# Altium PCB AT89S52多功能板.PcbDoc (part 4 of 5)
Units mm, origin at the board's own origin, x right, y up, seen from the top; angles counter-clockwise.
Board outline 152.4 x 101.6 mm, 2 copper layers (Top Layer, Bottom Layer); 140 components, 143 nets, 570 pads, 50 vias.
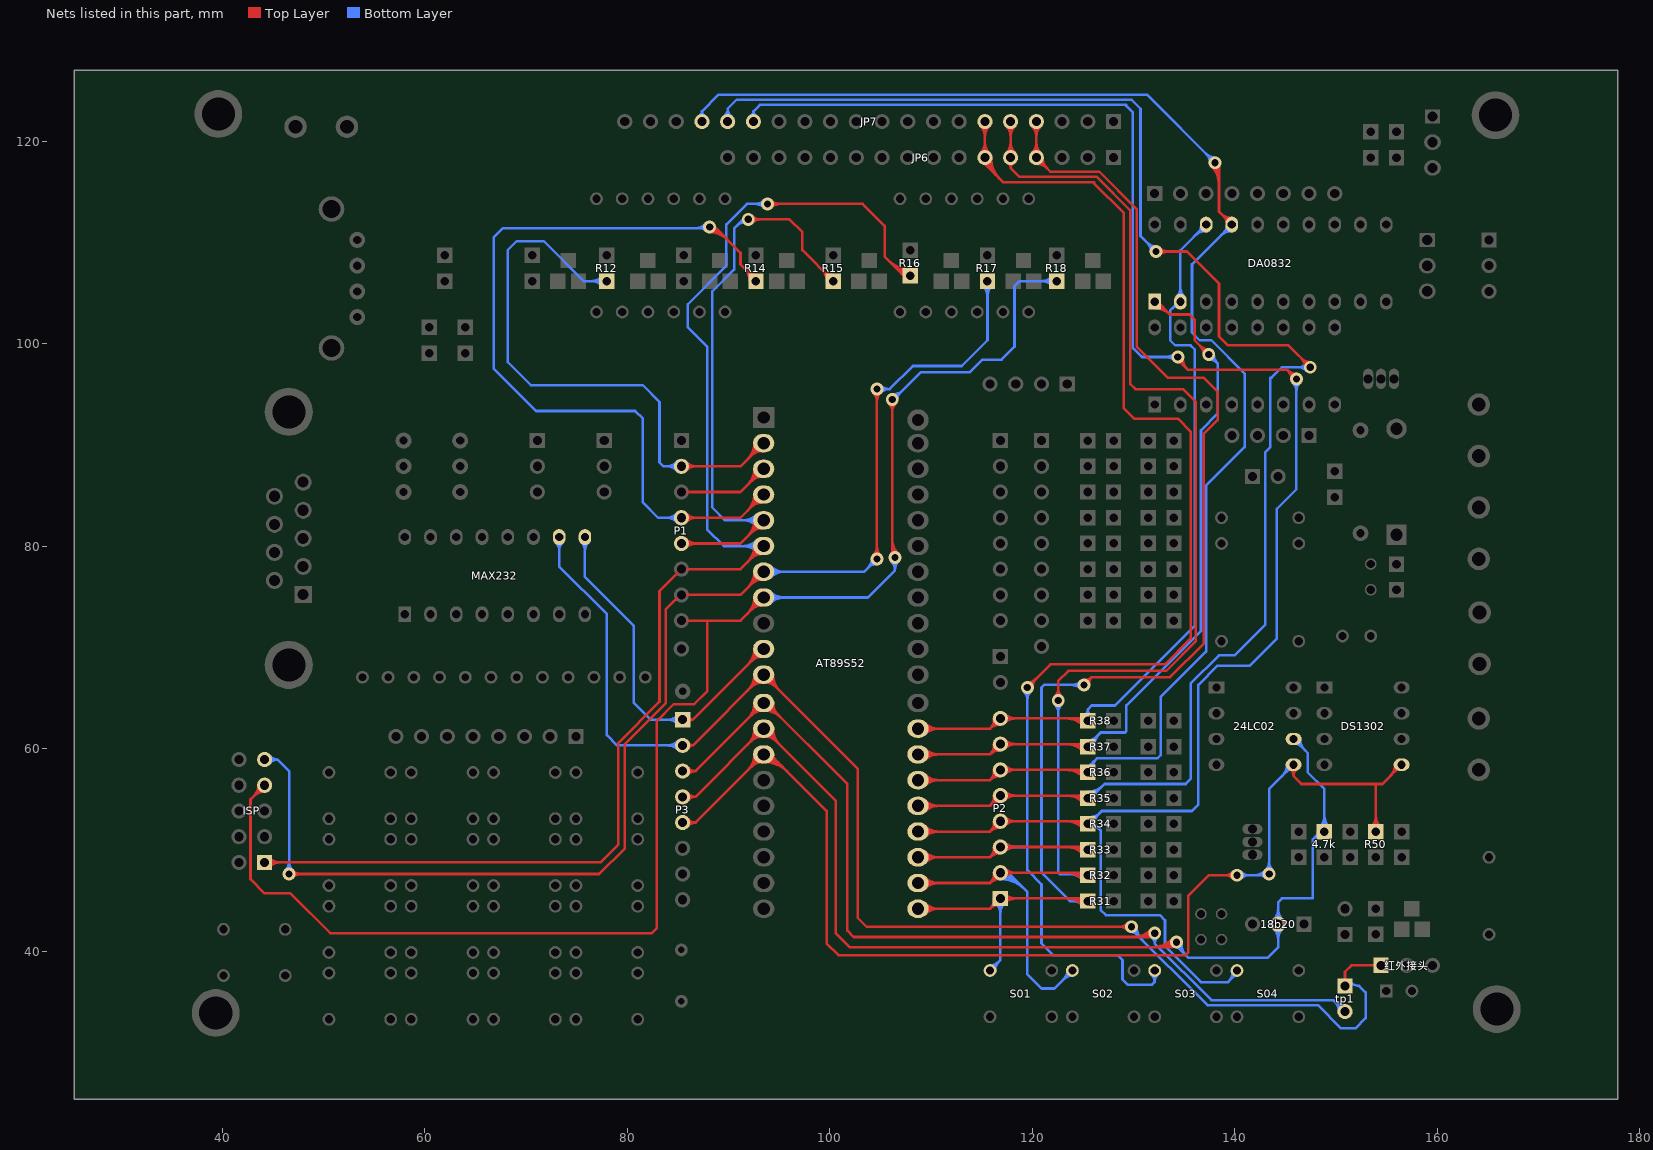
[diagram p4: the nets of this part, all layers, seen from the top]

## Via types
v1: diameter 1.27, hole 0.711, Top Layer to Bottom Layer, 50 vias

## Nets (pads, with @x,y where several pads share a name; then routed paths per layer and width w, separated by ;. In a path a pad name is that pad's centre, name@x,y a point inside that pad or via, vN(x,y) a via of type N, cw(c..) or ccw(c..) an arc to the next point about the centre after c; other vN are vias at no path point) (continued)
P11: AT89S52.2 P1.2 R12.1 | length 73.9
  Top Layer w0.254: P1.2@85.344,87.884 91.183,87.884 AT89S52.2@93.468,90.169 ; P1.2@85.605,87.623 cw(c86.235,86.993) 86.235,87.884 cw(c86.235,88.775) P1.2@85.605,88.145 ; P1.2@85.785,87.443 cw(c86.848,86.38) 86.848,87.884 cw(c86.848,89.388) P1.2@85.785,88.325 ; 91.888,88.589 ccw(c90.309,90.169) AT89S52.2@92.543,90.169 ; 92.251,88.951 cw(c93.318,87.884) AT89S52.2@93.318,89.394 ; 92.322,89.023 ccw(c91.176,90.169) AT89S52.2@92.797,90.169 ; 92.684,89.385 cw(c93.318,88.751) AT89S52.2@93.318,89.648 ; 92.756,89.456 ccw(c92.043,90.169) AT89S52.2@93.051,90.169
  Bottom Layer w0.254: R12.1@77.529,105.723 ccw(c76.445,104.639) 76.445,106.172 ccw(c76.445,107.705) R12.1@77.529,106.621 ; R12.1@77.709,105.903 ccw(c77.058,105.252) 77.058,106.172 ccw(c77.058,107.092) R12.1@77.709,106.441 ; R12.1@77.978,106.172 75.692,106.172 71.755,110.109 69.088,110.109 68.199,109.22 68.199,98.171 70.485,95.885 81.534,95.885 83.185,94.234 83.185,88.265 83.566,87.884 P1.2@85.344,87.884 ; P1.2@84.903,87.443 ccw(c83.84,86.38) 83.84,87.884 ccw(c83.84,89.388) P1.2@84.903,88.325 ; P1.2@85.083,87.623 ccw(c84.453,86.993) 84.453,87.884 ccw(c84.453,88.775) P1.2@85.083,88.145
P12: P1.3 R13.1 | length 65.1
  Bottom Layer w0.254: P1.3@84.903,84.903 ccw(c83.84,83.84) 83.84,85.344 ccw(c83.84,86.848) P1.3@84.903,85.785 ; P1.3@85.083,85.083 ccw(c84.453,84.453) 84.453,85.344 ccw(c84.453,86.235) P1.3@85.083,85.605 ; R13.1@85.09,105.791 ccw(c84.328,105.22) 84.328,106.172 ; R13.1@85.09,106.553 cw(c84.328,107.124) 84.328,106.172 ; P1.3@85.344,85.344 83.312,85.344 82.296,86.36 82.296,93.599 81.153,94.742 70.739,94.742 67.564,97.917 67.564,109.982 68.326,110.744 79.756,110.744 84.328,106.172 ; R13.1@85.598,106.172 84.328,106.172
P12: AT89S52.3 | length 14.8
  Top Layer w0.254: 85.344,85.344 91.183,85.344 AT89S52.3@93.468,87.629 ; 91.888,86.049 ccw(c90.309,87.629) AT89S52.3@92.543,87.629 ; 92.251,86.411 cw(c93.318,85.344) AT89S52.3@93.318,86.854 ; 92.322,86.483 ccw(c91.176,87.629) AT89S52.3@92.797,87.629 ; 92.684,86.845 cw(c93.318,86.211) AT89S52.3@93.318,87.108 ; 92.756,86.916 ccw(c92.043,87.629) AT89S52.3@93.051,87.629
P13: 
P13: AT89S52.4 P1.4 R14.1 | length 104.3
  Top Layer w0.254: P1.4@85.344,82.804 91.183,82.804 AT89S52.4@93.468,85.089 ; P1.4@85.605,82.543 cw(c86.235,81.913) 86.235,82.804 cw(c86.235,83.695) P1.4@85.605,83.065 ; P1.4@85.785,82.363 cw(c86.848,81.3) 86.848,82.804 cw(c86.848,84.308) P1.4@85.785,83.245 ; v1@88.138,110.998 cw(c88.138,108.545) 89.872,110.28 ; v1@88.138,111.252 cw(c88.138,109.412) 89.439,110.713 ; 89.005,111.147 ccw(c88.138,110.28) v1(88.138,111.506) 88.646,111.506 91.186,108.966 91.186,107.823 92.71,106.299 R14.1@92.71,106.172 ; 91.536,107.473 cw(c90.235,106.172) R14.1@92.075,106.172 ; 91.843,107.166 ccw(c92.71,108.033) R14.1@92.71,106.807 ; 91.888,83.509 ccw(c90.309,85.089) AT89S52.4@92.543,85.089 ; 91.97,107.039 cw(c91.103,106.172) R14.1@92.329,106.172 ; 92.251,83.871 cw(c93.318,82.804) AT89S52.4@93.318,84.314 ; 92.322,83.943 ccw(c91.176,85.089) AT89S52.4@92.797,85.089 ; 92.684,84.305 cw(c93.318,83.671) AT89S52.4@93.318,84.568 ; 92.756,84.376 ccw(c92.043,85.089) AT89S52.4@93.051,85.089
  Bottom Layer w0.254: P1.4@84.903,82.363 ccw(c83.84,81.3) 83.84,82.804 ccw(c83.84,84.308) P1.4@84.903,83.245 ; P1.4@85.083,82.543 ccw(c84.453,81.913) 84.453,82.804 ccw(c84.453,83.695) P1.4@85.083,83.065 ; P1.4@85.344,82.804 83.058,82.804 81.534,84.328 81.534,92.583 80.772,93.345 70.993,93.345 66.802,97.536 66.802,110.49 67.691,111.379 v1@88.011,111.379 ; 86.605,111.379 ccw(c86.605,113.039) v1@87.779,111.865 ; v1@87.779,111.147 ccw(c87.218,110.586) 87.218,111.379 ccw(c87.218,112.426) v1@87.958,111.686
P14: 
P14: AT89S52.5 P1.5 R15.1 | length 79.3
  Top Layer w0.254: P1.5@85.344,80.264 91.183,80.264 AT89S52.5@93.468,82.549 ; P1.5@85.605,80.003 cw(c86.235,79.373) 86.235,80.264 cw(c86.235,81.155) P1.5@85.605,80.525 ; P1.5@85.785,79.823 cw(c86.848,78.76) 86.848,80.264 cw(c86.848,81.768) P1.5@85.785,80.705 ; 91.888,80.969 ccw(c90.309,82.549) AT89S52.5@92.543,82.549 ; v1(91.948,112.268) 96.012,112.268 97.282,110.998 97.282,109.22 R15.1@100.33,106.172 ; 92.251,81.331 cw(c93.318,80.264) AT89S52.5@93.318,81.774 ; v1@92.307,111.909 cw(c93.174,111.042) 93.174,112.268 cw(c93.174,113.494) v1@92.307,112.627 ; 92.322,81.403 ccw(c91.176,82.549) AT89S52.5@92.797,82.549 ; 92.684,81.765 cw(c93.318,81.131) AT89S52.5@93.318,82.028 ; 92.756,81.836 ccw(c92.043,82.549) AT89S52.5@93.051,82.549 ; R15.1@99.695,106.172 ccw(c98.162,106.172) 99.246,107.256 ccw(c100.33,108.34) R15.1@100.33,106.807 ; R15.1@99.949,106.172 ccw(c99.029,106.172) 99.68,106.822 ccw(c100.33,107.473) R15.1@100.33,106.553
  Bottom Layer w0.254: 90.706,111.534 cw(c91.869,110.372) v1@91.937,112.014 ; 91.115,111.943 cw(c91.901,111.157) v1(91.948,112.268) 91.44,112.268 90.551,111.379 90.551,107.315 88.392,105.156 88.392,83.82 89.663,82.549 AT89S52.5@93.468,82.549 ; AT89S52.5@92.77,82.001 ccw(c91.446,80.677) 91.446,82.549 ccw(c91.446,84.421) AT89S52.5@92.77,83.097 ; AT89S52.5@92.95,82.18 ccw(c92.059,81.29) 92.059,82.549 ccw(c92.059,83.808) AT89S52.5@92.95,82.918
P15: AT89S52.6 ISP.1 R16.1 | length 161.9
  Top Layer w0.254: ISP.1@44.196,48.768 77.343,48.768 79.121,50.546 79.121,60.579 83.185,64.643 83.185,75.565 85.344,77.724 91.183,77.724 AT89S52.6@93.468,80.009 ; ISP.1@44.457,48.507 cw(c45.087,47.877) 45.087,48.768 cw(c45.087,49.659) ISP.1@44.457,49.029 ; ISP.1@44.637,48.327 cw(c45.7,47.264) 45.7,48.768 cw(c45.7,50.272) ISP.1@44.637,49.209 ; 91.888,78.429 ccw(c90.309,80.009) AT89S52.6@92.543,80.009 ; 92.251,78.791 cw(c93.318,77.724) AT89S52.6@93.318,79.234 ; 92.322,78.863 ccw(c91.176,80.009) AT89S52.6@92.797,80.009 ; 92.684,79.225 cw(c93.318,78.591) AT89S52.6@93.318,79.488 ; 92.756,79.296 ccw(c92.043,80.009) AT89S52.6@93.051,80.009 ; v1(93.853,113.792) 103.251,113.792 105.41,111.633 105.41,108.585 107.315,106.68 R16.1@107.95,106.68 ; v1@94.212,113.433 cw(c95.079,112.566) 95.079,113.792 cw(c95.079,115.018) v1@94.212,114.151 ; 105.782,108.213 ccw(c107.95,110.381) R16.1@107.95,107.315 ; 106.216,107.779 ccw(c107.95,109.514) R16.1@107.95,107.061 ; 106.649,107.346 ccw(c107.95,108.647) R16.1@107.95,106.807 ; 107.083,106.912 ccw(c107.95,107.779) R16.1@107.95,106.553
  Bottom Layer w0.254: AT89S52.6@92.77,79.461 ccw(c91.446,78.137) 91.446,80.009 ccw(c91.446,81.881) AT89S52.6@92.77,80.557 ; AT89S52.6@92.95,79.64 ccw(c92.059,78.75) 92.059,80.009 ccw(c92.059,81.268) AT89S52.6@92.95,80.378 ; AT89S52.6@93.468,80.009 89.536,80.009 87.884,81.661 87.884,99.695 85.979,101.6 85.979,103.886 89.789,107.696 89.789,111.76 91.821,113.792 v1(93.853,113.792) ; v1@93.494,113.433 ccw(c92.627,112.566) 92.627,113.792 ccw(c92.627,115.018) v1@93.494,114.151
P16: AT89S52.7 ISP.9 R17.1 | length 159.9
  Top Layer w0.254: v1(46.609,47.625) 77.216,47.625 79.756,50.165 79.756,60.452 83.82,64.516 83.82,73.787 85.217,75.184 91.183,75.184 AT89S52.7@93.468,77.469 ; v1@46.968,47.266 cw(c47.835,46.399) 47.835,47.625 cw(c47.835,48.851) v1@46.968,47.984 ; 91.888,75.889 ccw(c90.309,77.469) AT89S52.7@92.543,77.469 ; 92.251,76.251 cw(c93.318,75.184) AT89S52.7@93.318,76.694 ; 92.322,76.323 ccw(c91.176,77.469) AT89S52.7@92.797,77.469 ; 92.684,76.685 cw(c93.318,76.051) AT89S52.7@93.318,76.948 ; 92.756,76.756 ccw(c92.043,77.469) AT89S52.7@93.051,77.469 ; v1@104.289,79.099 ccw(c103.422,79.966) 104.648,79.966 ccw(c105.874,79.966) v1@105.007,79.099 ; v1@104.289,95.145 cw(c103.422,94.278) 104.648,94.278 cw(c105.874,94.278) v1@105.007,95.145 ; v1(104.648,78.74) v1(104.648,95.504)
  Bottom Layer w0.254: ISP.9@44.196,58.928 45.466,58.928 ; ISP.9@44.488,58.702 cw(c44.948,58.346) 44.948,58.928 cw(c44.948,59.51) ISP.9@44.488,59.154 ; ISP.9@44.689,58.547 cw(c45.466,57.945) 45.466,58.928 ; ISP.9@44.689,59.309 ccw(c45.466,59.911) 45.466,58.928 ; v1@46.25,47.984 ccw(c45.383,48.851) 46.609,48.851 ccw(c47.835,48.851) v1@46.968,47.984 ; v1(46.609,47.625) 46.609,57.785 45.466,58.928 ; AT89S52.7@93.468,77.469 103.377,77.469 v1(104.648,78.74) ; AT89S52.7@93.987,77.1 cw(c94.877,76.21) 94.877,77.469 cw(c94.877,78.728) AT89S52.7@93.987,77.838 ; AT89S52.7@94.166,76.921 cw(c95.49,75.597) 95.49,77.469 cw(c95.49,79.341) AT89S52.7@94.166,78.017 ; v1@104.14,78.74 cw(c102.914,78.74) 103.781,77.873 cw(c104.648,77.006) v1@104.648,78.232 ; v1(104.648,95.504) 105.918,95.504 108.204,97.79 113.03,97.79 115.57,100.33 R17.1@115.57,106.172 ; v1@105.007,95.145 cw(c105.874,94.278) 105.874,95.504 cw(c105.874,96.73) v1@105.007,95.863 ; R17.1@115.121,105.723 cw(c114.037,104.639) 115.57,104.639 cw(c117.103,104.639) R17.1@116.019,105.723 ; R17.1@115.301,105.903 cw(c114.65,105.252) 115.57,105.252 cw(c116.49,105.252) R17.1@115.839,105.903
P17: AT89S52.8 ISP.7 R18.1 | length 178.9
  Top Layer w0.254: ISP.7@43.573,56.388 cw(c42.069,56.388) 43.132,55.324 cw(c44.196,54.261) ISP.7@44.196,55.765 ; ISP.7@43.827,56.388 cw(c42.936,56.388) 43.566,55.758 cw(c44.196,55.128) ISP.7@44.196,56.019 ; ISP.7@44.196,56.388 42.799,54.991 42.799,47.117 44.196,45.72 46.736,45.72 50.673,41.783 82.423,41.783 82.931,42.291 82.931,62.738 84.582,64.389 86.614,64.389 87.884,65.659 87.884,72.644 ; 85.344,72.644 91.183,72.644 AT89S52.8@93.468,74.929 ; 91.888,73.349 ccw(c90.309,74.929) AT89S52.8@92.543,74.929 ; 92.251,73.711 cw(c93.318,72.644) AT89S52.8@93.318,74.154 ; 92.322,73.783 ccw(c91.176,74.929) AT89S52.8@92.797,74.929 ; 92.684,74.145 cw(c93.318,73.511) AT89S52.8@93.318,74.408 ; 92.756,74.216 ccw(c92.043,74.929) AT89S52.8@93.051,74.929 ; v1@105.813,94.129 cw(c104.946,93.262) 106.172,93.262 cw(c107.398,93.262) v1@106.531,94.129 ; v1@106.067,79.226 ccw(c105.813,79.48) 106.172,79.48 ccw(c107.039,79.48) v1(106.426,78.867) 106.172,79.121 v1(106.172,94.488) ; 106.172,80.093 ccw(c107.652,80.093) v1@106.606,79.047 ; 106.172,80.707 ccw(c108.266,80.707) v1@106.785,79.226
  Bottom Layer w0.254: AT89S52.8@93.468,74.929 103.758,74.929 106.426,77.597 v1(106.426,78.867) ; AT89S52.8@93.987,74.56 cw(c94.877,73.67) 94.877,74.929 cw(c94.877,76.188) AT89S52.8@93.987,75.298 ; AT89S52.8@94.166,74.381 cw(c95.49,73.057) 95.49,74.929 cw(c95.49,76.801) AT89S52.8@94.166,75.477 ; v1@106.067,78.508 cw(c105.2,77.641) 106.426,77.641 cw(c107.652,77.641) v1@106.785,78.508 ; v1(106.172,94.488) 106.299,94.488 107.188,95.377 cw(c106.263,96.302) v1@106.197,94.995 ; v1@106.185,94.742 ccw(c106.224,95.531) 106.783,94.972 ; v1@106.68,94.488 cw(c107.6,94.488) 106.949,95.138 ; 107.315,95.504 108.966,97.155 113.792,97.155 115.062,98.425 116.967,98.425 118.237,99.695 118.237,105.664 118.745,106.172 R18.1@122.428,106.172 ; R18.1@121.979,105.723 ccw(c120.895,104.639) 120.895,106.172 ccw(c120.895,107.705) R18.1@121.979,106.621 ; R18.1@122.159,105.903 ccw(c121.508,105.252) 121.508,106.172 ccw(c121.508,107.092) R18.1@122.159,106.441
P20: AT89S52.21 JP6.4 JP7.4 P2.1 R31.1 S01.1 | length 172.3
  Top Layer w0.254: AT89S52.21@108.712,44.196 115.824,44.196 ; AT89S52.21@109.231,43.827 cw(c110.121,42.937) 110.121,44.196 cw(c110.121,45.455) AT89S52.21@109.231,44.565 ; AT89S52.21@109.41,43.648 cw(c110.734,42.324) 110.734,44.196 cw(c110.734,46.068) AT89S52.21@109.41,44.744 ; P2.1@116.217,45.192 cw(c114.873,45.147) 115.824,44.196 ; P2.1@116.471,45.2 cw(c115.675,45.174) 116.238,44.61 cw(c116.802,44.047) P2.1@116.828,44.843 ; P2.1@116.82,44.589 ccw(c116.775,43.245) 115.824,44.196 ; P2.1@117.101,44.951 cw(c117.731,44.321) 117.731,45.212 cw(c117.731,46.103) P2.1@117.101,45.473 ; P2.1@117.281,44.771 cw(c118.344,43.708) 118.344,45.212 cw(c118.344,46.716) P2.1@117.281,45.653 ; JP6.4@119.955,118.805 ccw(c118.892,119.868) 120.396,119.868 ccw(c121.9,119.868) JP6.4@120.837,118.805 ; JP7.4@119.955,121.479 cw(c118.892,120.416) 120.396,120.416 cw(c121.9,120.416) JP7.4@120.837,121.479 ; JP6.4@120.135,118.625 ccw(c119.505,119.255) 120.396,119.255 ccw(c121.287,119.255) JP6.4@120.657,118.625 ; JP7.4@120.135,121.659 cw(c119.505,121.029) 120.396,121.029 cw(c121.287,121.029) JP7.4@120.657,121.659 ; JP6.4@120.396,117.741 cw(c120.396,116.237) 121.46,117.3 cw(c122.523,118.364) JP6.4@121.019,118.364 ; JP6.4@120.396,117.995 cw(c120.396,117.104) 121.026,117.734 cw(c121.656,118.364) JP6.4@120.765,118.364 ; JP7.4@120.396,121.92 JP6.4@120.396,118.364 121.793,116.967 126.619,116.967 130.302,113.284 130.302,99.695 133.35,96.647 136.906,96.647 138.303,95.25 138.303,92.456 136.906,91.059 136.906,70.358 133.604,67.056 125.857,67.056 ; 123.33,45.212 cw(c123.33,42.812) R31.1@125.027,44.509 ; 123.943,45.212 cw(c123.943,43.425) R31.1@125.207,44.689 ; R31.1@125.027,45.407 cw(c124.556,45.878) 124.556,45.212 cw(c124.556,44.038) R31.1@125.386,44.868 ; v1(125.095,66.294) 125.857,67.056 ; v1@125.144,66.8 ccw(c125.228,67.685) 125.857,67.056 ; R31.1@125.476,44.958 125.222,45.212 P2.1@116.84,45.212 115.824,44.196 ; v1@125.601,66.343 cw(c126.486,66.427) 125.857,67.056
  Bottom Layer w0.254: S01.1@115.824,38.1 116.84,39.116 P2.1@116.84,45.212 ; S01.1@115.824,38.608 ccw(c115.824,39.834) 116.691,38.967 ccw(c117.558,38.1) S01.1@116.332,38.1 ; P2.1@116.399,44.771 cw(c115.336,43.708) 116.84,43.708 cw(c118.344,43.708) P2.1@117.281,44.771 ; P2.1@116.579,44.951 cw(c115.949,44.321) 116.84,44.321 cw(c117.731,44.321) P2.1@117.101,44.951 ; v1@124.736,65.935 ccw(c123.869,65.068) 123.869,66.294 ccw(c123.869,67.52) v1@124.736,66.653 ; R31.1@125.027,44.509 ccw(c123.943,43.425) 123.943,44.958 ccw(c123.943,46.491) R31.1@125.027,45.407 ; v1(125.095,66.294) 121.158,66.294 120.904,66.04 120.904,47.752 123.698,44.958 R31.1@125.476,44.958 ; R31.1@125.207,44.689 ccw(c124.556,44.038) 124.556,44.958 ccw(c124.556,45.878) R31.1@125.207,45.227
P21: 
P21: AT89S52.22 JP6.5 JP7.5 P2.2 R32.1 S02.1 | length 182.5
  Top Layer w0.254: AT89S52.22@108.712,46.736 115.824,46.736 ; AT89S52.22@109.231,46.367 cw(c110.121,45.477) 110.121,46.736 cw(c110.121,47.995) AT89S52.22@109.231,47.105 ; AT89S52.22@109.41,46.188 cw(c110.734,44.864) 110.734,46.736 cw(c110.734,48.608) AT89S52.22@109.41,47.284 ; P2.2@116.217,47.732 cw(c114.873,47.687) 115.824,46.736 ; P2.2@116.471,47.74 cw(c115.675,47.714) 116.238,47.15 cw(c116.802,46.587) P2.2@116.828,47.383 ; P2.2@116.82,47.129 ccw(c116.775,45.785) 115.824,46.736 ; P2.2@117.101,47.491 cw(c117.731,46.861) 117.731,47.752 cw(c117.731,48.643) P2.2@117.101,48.013 ; P2.2@117.281,47.311 cw(c118.344,46.248) 118.344,47.752 cw(c118.344,49.256) P2.2@117.281,48.193 ; JP6.5@117.415,118.805 ccw(c116.352,119.868) 117.856,119.868 ccw(c119.36,119.868) JP6.5@118.297,118.805 ; JP7.5@117.415,121.479 cw(c116.352,120.416) 117.856,120.416 cw(c119.36,120.416) JP7.5@118.297,121.479 ; JP6.5@117.595,118.625 ccw(c116.965,119.255) 117.856,119.255 ccw(c118.747,119.255) JP6.5@118.117,118.625 ; JP7.5@117.595,121.659 cw(c116.965,121.029) 117.856,121.029 cw(c118.747,121.029) JP7.5@118.117,121.659 ; JP7.5@117.856,121.92 117.856,117.348 ; v1@122.196,65.129 ccw(c121.329,65.996) 122.555,65.996 ccw(c123.781,65.996) v1@122.914,65.129 ; v1(122.555,64.77) 122.555,66.675 123.571,67.691 133.223,67.691 136.144,70.612 136.144,94.234 134.874,95.504 130.175,95.504 129.667,96.012 129.667,113.157 126.365,116.459 118.745,116.459 117.856,117.348 ; 123.33,47.752 cw(c123.33,45.352) R32.1@125.027,47.049 ; 123.943,47.752 cw(c123.943,45.965) R32.1@125.207,47.229 ; R32.1@125.027,47.947 cw(c124.556,48.418) 124.556,47.752 cw(c124.556,46.578) R32.1@125.386,47.408 ; R32.1@125.603,47.498 R32.1@125.476,47.498 125.222,47.752 P2.2@116.84,47.752 115.824,46.736 ; 117.856,117.348 ccw(c117.339,117.348) 117.573,117.809 cw(c117.339,117.348) 117.856,117.348 ; 117.856,117.348 cw(c118.373,117.348) 118.139,117.809 ccw(c118.373,117.348) 117.856,117.348
  Bottom Layer w0.254: P2.2@116.84,47.129 cw(c116.84,43.785) 119.204,46.15 ; P2.2@116.84,47.383 cw(c116.84,44.653) 118.771,46.583 ; P2.2@116.84,47.637 cw(c116.84,45.52) 118.337,47.017 ; P2.2@116.84,47.752 117.602,47.752 ; P2.2@116.84,47.891 cw(c116.84,46.387) 117.904,47.45 ; v1@122.196,64.411 cw(c121.329,63.544) 122.555,63.544 cw(c123.781,63.544) v1@122.914,64.411 ; v1(122.555,64.77) 122.555,47.752 122.682,47.625 125.349,47.625 R32.1@125.476,47.498 ; S02.1@123.444,38.1 cw(c122.218,38.1) 123.085,37.233 cw(c123.952,36.366) S02.1@123.952,37.592 ; 123.636,47.625 cw(c123.636,45.658) R32.1@125.027,47.049 ; S02.1@123.952,38.1 122.174,36.322 120.904,36.322 119.507,37.719 119.507,45.847 117.602,47.752 ; R32.1@125.027,47.947 cw(c124.25,48.724) 124.25,47.625 cw(c124.25,46.272) R32.1@125.207,47.229 ; 117.602,47.752 ccw(c117.602,47.598) 117.451,47.628 cw(c117.602,47.598) 117.602,47.752 ; 117.602,47.752 cw(c117.602,47.906) 117.451,47.876 ccw(c117.602,47.906) 117.602,47.752
P22: 
P22: AT89S52.23 JP6.6 JP7.6 P2.3 R33.1 S03.1 | length 186.7
  Top Layer w0.254: AT89S52.23@108.712,49.276 115.824,49.276 ; AT89S52.23@109.231,48.907 cw(c110.121,48.017) 110.121,49.276 cw(c110.121,50.535) AT89S52.23@109.231,49.645 ; AT89S52.23@109.41,48.728 cw(c110.734,47.404) 110.734,49.276 cw(c110.734,51.148) AT89S52.23@109.41,49.824 ; JP6.6@114.875,118.805 ccw(c113.812,119.868) 115.316,119.868 ccw(c116.82,119.868) JP6.6@115.757,118.805 ; JP7.6@114.875,121.479 cw(c113.812,120.416) 115.316,120.416 cw(c116.82,120.416) JP7.6@115.757,121.479 ; JP6.6@115.055,118.625 ccw(c114.425,119.255) 115.316,119.255 ccw(c116.207,119.255) JP6.6@115.577,118.625 ; JP7.6@115.055,121.659 cw(c114.425,121.029) 115.316,121.029 cw(c116.207,121.029) JP7.6@115.577,121.659 ; JP6.6@115.177,118.367 ccw(c116.323,118.343) 115.513,117.532 ; JP7.6@115.316,121.92 115.316,117.729 117.094,115.951 126.111,115.951 126.111,115.824 129.032,112.903 129.032,93.599 130.048,92.583 134.366,92.583 135.636,91.313 135.636,70.866 133.096,68.326 121.793,68.326 v1(119.507,66.04) ; JP6.6@115.431,118.362 ccw(c117.149,118.326) 115.934,117.111 ; JP6.6@115.685,118.356 ccw(c117.974,118.309) 116.355,116.69 ; JP6.6@115.939,118.351 ccw(c118.8,118.292) 116.776,116.269 ; P2.3@116.217,50.272 cw(c114.873,50.227) 115.824,49.276 ; P2.3@116.471,50.28 cw(c115.675,50.254) 116.238,49.69 cw(c116.802,49.127) P2.3@116.828,49.923 ; P2.3@116.82,49.669 ccw(c116.775,48.325) 115.824,49.276 ; P2.3@117.101,50.031 cw(c117.731,49.401) 117.731,50.292 cw(c117.731,51.183) P2.3@117.101,50.553 ; P2.3@117.281,49.851 cw(c118.344,48.788) 118.344,50.292 cw(c118.344,51.796) P2.3@117.281,50.733 ; v1@119.507,66.548 ccw(c119.507,67.774) 120.374,66.907 ccw(c121.241,66.04) v1@120.015,66.04 ; 123.33,50.292 cw(c123.33,47.892) R33.1@125.027,49.589 ; 123.943,50.292 cw(c123.943,48.505) R33.1@125.207,49.769 ; R33.1@125.027,50.487 cw(c124.556,50.958) 124.556,50.292 cw(c124.556,49.118) R33.1@125.386,49.948 ; R33.1@125.476,50.038 125.222,50.292 P2.3@116.84,50.292 115.824,49.276
  Bottom Layer w0.254: P2.3@116.84,50.292 119.38,50.292 119.507,50.419 ; P2.3@117.101,50.031 cw(c117.731,49.401) 117.731,50.292 cw(c117.731,51.183) P2.3@117.101,50.553 ; P2.3@117.281,49.851 cw(c118.344,48.788) 118.344,50.292 cw(c118.344,51.796) P2.3@117.281,50.733 ; v1@119.148,65.681 cw(c118.281,64.814) 119.507,64.814 cw(c120.733,64.814) v1@119.866,65.681 ; v1(119.507,66.04) 119.507,48.006 120.904,46.609 120.904,40.767 122.047,39.624 128.397,39.624 128.905,39.116 128.905,37.211 129.413,36.703 131.826,36.703 132.08,36.957 ; S03.1@131.74,37.723 cw(c131.048,36.957) 132.08,36.957 ; S03.1@132.08,38.1 132.08,36.957 ; S03.1@132.42,37.723 ccw(c133.112,36.957) 132.08,36.957
P23: 
P23: AT89S52.24 JP7.15 P2.4 R34.1 S04.1 | length 222.6
  Top Layer w0.254: AT89S52.24@108.712,51.816 115.824,51.816 ; AT89S52.24@109.231,51.447 cw(c110.121,50.557) 110.121,51.816 cw(c110.121,53.075) AT89S52.24@109.231,52.185 ; AT89S52.24@109.41,51.268 cw(c110.734,49.944) 110.734,51.816 cw(c110.734,53.688) AT89S52.24@109.41,52.364 ; P2.4@116.217,52.812 cw(c114.873,52.767) 115.824,51.816 ; P2.4@116.471,52.82 cw(c115.675,52.794) 116.238,52.23 cw(c116.802,51.667) P2.4@116.828,52.463 ; P2.4@116.82,52.209 ccw(c116.775,50.865) 115.824,51.816 ; P2.4@117.101,52.571 cw(c117.731,51.941) 117.731,52.832 cw(c117.731,53.723) P2.4@117.101,53.093 ; P2.4@117.281,52.391 cw(c118.344,51.328) 118.344,52.832 cw(c118.344,54.336) P2.4@117.281,53.273 ; 123.33,52.832 cw(c123.33,50.432) R34.1@125.027,52.129 ; 123.943,52.832 cw(c123.943,51.045) R34.1@125.207,52.309 ; R34.1@125.027,53.027 cw(c124.556,53.498) 124.556,52.832 cw(c124.556,51.658) R34.1@125.386,52.488 ; R34.1@125.476,52.578 125.222,52.832 P2.4@116.84,52.832 115.824,51.816 ; v1@134.366,98.171 cw(c134.366,97.558) 134.8,97.991 ; v1(134.366,98.679) 134.366,98.425 135.382,97.409 145.161,97.409 v1(146.069,96.501) ; v1@134.619,98.652 ccw(c135.523,98.554) 134.88,97.911 ; v1@134.871,98.625 ccw(c136.2,98.481) 135.255,97.536 ; v1@145.561,96.501 ccw(c144.335,96.501) 145.202,97.368 ccw(c146.069,98.235) v1@146.069,97.009
  Bottom Layer w0.254: JP7.15@92.456,121.92 92.456,122.936 ; R34.1@125.476,53.213 ccw(c125.476,55.053) 126.777,53.752 ; R34.1@125.603,52.578 126.873,53.848 135.763,53.848 136.398,54.483 136.398,66.294 138.303,68.199 141.478,68.199 144.145,70.866 144.145,83.693 146.069,85.617 v1(146.069,96.501) ; 126.343,53.318 cw(c125.476,54.185) 125.476,52.959 R34.1@125.476,52.578 R34.1@126.111,52.578 ; 126.47,53.445 ccw(c127.337,52.578) R34.1@126.111,52.578 ; v1@134.007,98.32 ccw(c133.14,97.453) 133.14,98.679 ccw(c133.14,99.905) v1@134.007,99.038 ; v1(134.366,98.679) 130.81,98.679 129.921,99.568 129.921,122.809 129.286,123.444 129.286,123.571 93.091,123.571 92.456,122.936 ; 139.446,37.084 ccw(c138.749,37.781) S04.1@139.712,37.991 ; S04.1@139.96,38.046 cw(c139.288,37.899) 139.774,37.412 cw(c140.208,36.979) S04.1@140.208,37.592 ; S04.1@140.208,38.1 140.208,37.846 139.319,36.957 136.652,36.957 133.096,40.513 133.096,43.053 132.588,43.561 127.254,43.561 126.746,44.069 126.746,51.943 R34.1@126.111,52.578 ; v1@145.71,96.142 cw(c144.843,95.275) 146.069,95.275 cw(c147.295,95.275) v1@146.428,96.142 ; 92.456,122.936 ccw(c92.973,122.936) 92.739,122.475 cw(c92.973,122.936) 92.456,122.936 ; 92.456,122.936 cw(c91.939,122.936) 92.173,122.475 ccw(c91.939,122.936) 92.456,122.936 ; R34.1@125.514,52.457 cw(c125.795,51.548) 126.468,52.221 ccw(c125.795,51.548) R34.1@125.514,52.457 ; R34.1@125.589,52.214 cw(c125.936,51.094) 126.766,51.923 ccw(c125.936,51.094) R34.1@125.589,52.214
P24: 
P24: AT89S52.25 JP7.16 P2.5 R35.1 | length 188
  Top Layer w0.254: AT89S52.25@108.712,54.356 115.824,54.356 ; AT89S52.25@109.231,53.987 cw(c110.121,53.097) 110.121,54.356 cw(c110.121,55.615) AT89S52.25@109.231,54.725 ; AT89S52.25@109.41,53.808 cw(c110.734,52.484) 110.734,54.356 cw(c110.734,56.228) AT89S52.25@109.41,54.904 ; P2.5@116.217,55.352 cw(c114.873,55.307) 115.824,54.356 ; P2.5@116.471,55.36 cw(c115.675,55.334) 116.238,54.77 cw(c116.802,54.207) P2.5@116.828,55.003 ; P2.5@116.82,54.749 ccw(c116.775,53.405) 115.824,54.356 ; P2.5@117.101,55.111 cw(c117.731,54.481) 117.731,55.372 cw(c117.731,56.263) P2.5@117.101,55.633 ; P2.5@117.281,54.931 cw(c118.344,53.868) 118.344,55.372 cw(c118.344,56.876) P2.5@117.281,55.813 ; 123.33,55.372 cw(c123.33,52.972) R35.1@125.027,54.669 ; 123.943,55.372 cw(c123.943,53.585) R35.1@125.207,54.849 ; R35.1@125.027,55.567 cw(c124.556,56.038) 124.556,55.372 cw(c124.556,54.198) R35.1@125.386,55.028 ; R35.1@125.476,55.118 125.222,55.372 P2.5@116.84,55.372 115.824,54.356 ; v1(132.207,109.093) 135.255,109.093 138.43,105.918 138.43,100.711 139.319,99.822 145.288,99.822 v1(147.447,97.663) ; v1@132.566,108.734 cw(c133.433,107.867) 133.433,109.093 cw(c133.433,110.319) v1@132.566,109.452 ; v1@146.939,97.663 ccw(c145.713,97.663) 146.58,98.53 ccw(c147.447,99.397) v1@147.447,98.171
  Bottom Layer w0.254: JP7.16@89.535,122.413 ccw(c88.933,123.19) 89.916,123.19 ; JP7.16@89.69,122.212 ccw(c89.334,122.672) 89.916,122.672 ccw(c90.498,122.672) JP7.16@90.142,122.212 ; JP7.16@89.916,121.92 89.916,123.19 ; JP7.16@90.297,122.413 cw(c90.899,123.19) 89.916,123.19 ; R35.1@125.476,55.118 125.73,55.118 127.127,56.515 135.128,56.515 135.636,57.023 135.636,66.421 138.43,69.215 139.954,69.215 143.002,72.263 143.002,89.281 143.51,89.789 143.51,96.647 143.637,96.647 144.653,97.663 v1(147.447,97.663) ; R35.1@125.476,55.499 ccw(c125.476,57.032) 126.56,55.948 ; R35.1@125.476,55.753 ccw(c125.476,57.899) 126.994,56.382 ; R35.1@126.111,55.118 cw(c127.031,55.118) 126.38,55.768 ; v1@131.699,109.093 ccw(c130.473,109.093) 131.34,109.96 ccw(c132.207,110.827) v1@132.207,109.601 ; v1(132.207,109.093) 130.683,110.617 130.683,123.19 129.794,124.079 90.805,124.079 89.916,123.19 ; v1@147.088,97.304 ccw(c146.221,96.437) 146.221,97.663 ccw(c146.221,98.889) v1@147.088,98.022
P25: 
P25: AT89S52.26 DA0832.17 JP7.17 P2.6 R36.1 | length 185
  Top Layer w0.254: AT89S52.26@108.712,56.896 115.824,56.896 ; AT89S52.26@109.231,56.527 cw(c110.121,55.637) 110.121,56.896 cw(c110.121,58.155) AT89S52.26@109.231,57.265 ; AT89S52.26@109.41,56.348 cw(c110.734,55.024) 110.734,56.896 cw(c110.734,58.768) AT89S52.26@109.41,57.444 ; P2.6@116.217,57.892 cw(c114.873,57.847) 115.824,56.896 ; P2.6@116.471,57.9 cw(c115.675,57.874) 116.238,57.31 cw(c116.802,56.747) P2.6@116.828,57.543 ; P2.6@116.82,57.289 ccw(c116.775,55.945) 115.824,56.896 ; P2.6@117.101,57.651 cw(c117.731,57.021) 117.731,57.912 cw(c117.731,58.803) P2.6@117.101,58.173 ; P2.6@117.281,57.471 cw(c118.344,56.408) 118.344,57.912 cw(c118.344,59.416) P2.6@117.281,58.353 ; 123.33,57.912 cw(c123.33,55.512) R36.1@125.027,57.209 ; 123.943,57.912 cw(c123.943,56.125) R36.1@125.207,57.389 ; R36.1@125.027,58.107 cw(c124.556,58.578) 124.556,57.912 cw(c124.556,56.738) R36.1@125.386,57.568 ; R36.1@125.476,57.658 125.222,57.912 P2.6@116.84,57.912 115.824,56.896 ; v1@137.69,117.497 cw(c135.903,115.71) 138.43,115.71 ; v1@137.869,117.676 cw(c136.516,116.323) 138.43,116.323 ; 138.43,116.936 ccw(c137.129,116.936) v1(138.049,117.856) 138.43,117.475 138.43,113.027 DA0832.17@139.701,111.756 ; 138.574,112.884 ccw(c139.701,114.011) DA0832.17@139.701,112.417 ; 138.966,112.491 cw(c138.393,111.919) DA0832.17@139.203,111.919 ; 139.007,112.45 ccw(c139.701,113.144) DA0832.17@139.701,112.163
  Bottom Layer w0.254: JP7.17@87.376,121.92 87.376,122.936 ; R36.1@125.476,57.658 125.476,58.166 126.365,59.055 ; v1@137.541,117.856 ccw(c136.315,117.856) 137.182,118.723 ccw(c138.049,119.59) v1@138.049,118.364 ; v1(138.049,117.856) 131.318,124.587 89.027,124.587 87.376,122.936 ; 138.603,110.658 cw(c139.661,109.6) DA0832.17@139.691,111.096 ; 138.966,111.021 ccw(c138.393,111.594) DA0832.17@139.203,111.594 ; 139.024,111.08 cw(c139.677,110.427) DA0832.17@139.696,111.35 ; DA0832.17@139.701,111.756 138.684,110.739 138.679,110.739 135.763,107.823 135.763,101.092 136.525,100.33 137.668,100.33 140.97,97.028 140.97,89.789 137.16,85.979 137.16,69.596 132.673,65.109 132.673,59.351 132.376,59.055 126.365,59.055 ; 87.376,122.936 ccw(c87.893,122.936) 87.659,122.475 cw(c87.893,122.936) 87.376,122.936 ; 87.376,122.936 cw(c86.859,122.936) 87.093,122.475 ccw(c86.859,122.936) 87.376,122.936 ; 126.365,59.055 ccw(c127.197,58.223) 126.079,57.856 cw(c127.197,58.223) 126.365,59.055 ; R36.1@125.597,57.698 cw(c126.317,57.934) 125.781,58.471 ccw(c126.317,57.934) R36.1@125.597,57.698 ; R36.1@125.838,57.777 cw(c126.757,58.079) 126.073,58.763 ccw(c126.757,58.079) R36.1@125.838,57.777
P26: 
P26: AT89S52.27 DA0832.1 P2.7 R37.1 | length 99.9
  Top Layer w0.254: AT89S52.27@108.712,59.436 115.824,59.436 ; AT89S52.27@109.231,59.067 cw(c110.121,58.177) 110.121,59.436 cw(c110.121,60.695) AT89S52.27@109.231,59.805 ; AT89S52.27@109.41,58.888 cw(c110.734,57.564) 110.734,59.436 cw(c110.734,61.308) AT89S52.27@109.41,59.984 ; P2.7@116.217,60.432 cw(c114.873,60.387) 115.824,59.436 ; P2.7@116.471,60.44 cw(c115.675,60.414) 116.238,59.85 cw(c116.802,59.287) P2.7@116.828,60.083 ; P2.7@116.82,59.829 ccw(c116.775,58.485) 115.824,59.436 ; P2.7@117.101,60.191 cw(c117.731,59.561) 117.731,60.452 cw(c117.731,61.343) P2.7@117.101,60.713 ; P2.7@117.281,60.011 cw(c118.344,58.948) 118.344,60.452 cw(c118.344,61.956) P2.7@117.281,60.893 ; 123.33,60.452 cw(c123.33,58.052) R37.1@125.027,59.749 ; 123.943,60.452 cw(c123.943,58.665) R37.1@125.207,59.929 ; R37.1@125.027,60.647 cw(c124.556,61.118) 124.556,60.452 cw(c124.556,59.278) R37.1@125.386,60.108 ; R37.1@125.476,60.198 125.222,60.452 P2.7@116.84,60.452 115.824,59.436 ; DA0832.1@132.081,103.476 cw(c132.081,101.261) 133.647,102.827 ; DA0832.1@132.081,103.73 cw(c132.081,102.129) 133.213,103.261 ; DA0832.1@132.081,103.984 cw(c132.081,102.996) 132.78,103.694 ; DA0832.1@132.081,104.136 132.338,104.136 133.604,102.87 135.509,102.87 136.017,102.362 136.017,100.33 v1(137.414,98.933) ; v1@136.906,98.933 ccw(c135.68,98.933) 136.547,99.8 ccw(c137.414,100.667) v1@137.414,99.441
  Bottom Layer w0.254: R37.1@125.476,60.198 125.476,60.325 126.746,61.595 129.159,61.595 129.286,61.722 129.286,64.262 136.652,71.628 136.652,91.44 138.303,93.091 138.303,98.044 v1@137.287,99.06 ; R37.1@125.476,60.833 ccw(c125.476,62.059) 126.343,61.192 ; R37.1@125.857,60.198 cw(c127.083,60.198) 126.216,61.065 ; R37.1@126.111,60.198 cw(c127.951,60.198) 126.65,61.499 ; v1@137.414,98.425 cw(c137.414,97.199) 138.281,98.066 cw(c139.148,98.933) v1@137.922,98.933
P27: 
P27: AT89S52.28 DA0832.2 DA0832.18 P2.8 R38.1 | length 101.1
  Top Layer w0.254: AT89S52.28@108.712,61.976 115.824,61.976 ; AT89S52.28@109.231,61.607 cw(c110.121,60.717) 110.121,61.976 cw(c110.121,63.235) AT89S52.28@109.231,62.345 ; AT89S52.28@109.41,61.428 cw(c110.734,60.104) 110.734,61.976 cw(c110.734,63.848) AT89S52.28@109.41,62.524 ; P2.8@116.217,62.972 cw(c114.873,62.927) 115.824,61.976 ; P2.8@116.471,62.98 cw(c115.675,62.954) 116.238,62.39 cw(c116.802,61.827) P2.8@116.828,62.623 ; P2.8@116.82,62.369 ccw(c116.775,61.025) 115.824,61.976 ; P2.8@117.101,62.731 cw(c117.731,62.101) 117.731,62.992 cw(c117.731,63.883) P2.8@117.101,63.253 ; P2.8@117.281,62.551 cw(c118.344,61.488) 118.344,62.992 cw(c118.344,64.496) P2.8@117.281,63.433 ; 123.33,62.992 cw(c123.33,60.592) R38.1@125.027,62.289 ; 123.943,62.992 cw(c123.943,61.205) R38.1@125.207,62.469 ; R38.1@125.027,63.187 cw(c124.556,63.658) 124.556,62.992 cw(c124.556,61.818) R38.1@125.386,62.648 ; R38.1@125.476,62.738 125.222,62.992 P2.8@116.84,62.992 115.824,61.976
  Bottom Layer w0.254: R38.1@125.141,63.277 ccw(c124.765,63.881) 125.476,63.881 ; R38.1@125.603,62.738 R38.1@125.476,62.738 125.476,63.881 ; R38.1@125.811,63.277 cw(c126.187,63.881) 125.476,63.881 ; DA0832.2@134.269,104.651 ccw(c133.419,105.501) 134.621,105.501 ccw(c135.823,105.501) DA0832.2@134.973,104.651 ; DA0832.2@134.621,104.136 134.621,109.216 DA0832.18@137.161,111.756 ; DA0832.2@134.751,104.136 134.489,104.136 133.604,103.251 133.604,100.33 134.112,99.822 135.636,99.822 136.017,99.441 136.017,72.136 128.143,64.262 125.857,64.262 125.476,63.881 ; 136.034,110.629 cw(c137.161,109.501) DA0832.18@137.161,111.096 ; 136.426,111.021 ccw(c135.853,111.594) DA0832.18@136.663,111.594 ; 136.467,111.062 cw(c137.161,110.369) DA0832.18@137.161,111.35 ; 133.823,103.47 cw(c134.473,102.819) 134.59,103.732 ccw(c134.473,102.819) 133.823,103.47 ; 133.979,103.626 ccw(c133.631,103.974) 134.123,103.974 cw(c133.631,103.974) 133.979,103.626
P30: AT89S52.10 MAX232.9 P3.1 | length 48.4
  Top Layer w0.254: P3.1@85.471,62.865 86.484,62.865 ; 91.888,68.269 ccw(c90.309,69.849) AT89S52.10@92.543,69.849 ; 92.251,68.631 cw(c93.318,67.564) AT89S52.10@93.318,69.074 ; 92.322,68.703 ccw(c91.176,69.849) AT89S52.10@92.797,69.849 ; 92.684,69.065 cw(c93.318,68.431) AT89S52.10@93.318,69.328 ; 92.756,69.136 ccw(c92.043,69.849) AT89S52.10@93.051,69.849 ; AT89S52.10@93.468,69.849 86.484,62.865 ; 86.484,62.865 ccw(c86.484,62.353) 86.027,62.584 cw(c86.484,62.353) 86.484,62.865 ; 86.484,62.865 cw(c86.484,63.377) 86.027,63.146 ccw(c86.484,63.377) 86.484,62.865
  Bottom Layer w0.254: MAX232.9@75.468,80.381 cw(c74.618,79.531) 75.82,79.531 cw(c77.022,79.531) MAX232.9@76.172,80.381 ; MAX232.9@75.82,80.895 75.82,76.961 80.645,72.136 80.645,64.516 82.296,62.865 P3.1@85.471,62.865 ; P3.1@85.03,62.424 ccw(c83.967,61.361) 83.967,62.865 ccw(c83.967,64.369) P3.1@85.03,63.306 ; P3.1@85.21,62.604 ccw(c84.58,61.974) 84.58,62.865 ccw(c84.58,63.756) P3.1@85.21,63.126
P31: AT89S52.11 MAX232.10 P3.2 tp1.1 红外接头.1 | length 156.6
  Top Layer w0.254: P3.2@85.471,60.325 86.484,60.325 ; 91.888,65.729 ccw(c90.309,67.309) AT89S52.11@92.543,67.309 ; 92.251,66.091 cw(c93.318,65.024) AT89S52.11@93.318,66.534 ; 92.322,66.163 ccw(c91.176,67.309) AT89S52.11@92.797,67.309 ; 92.684,66.525 cw(c93.318,65.891) AT89S52.11@93.318,66.788 ; 92.756,66.596 ccw(c92.043,67.309) AT89S52.11@93.051,67.309 ; AT89S52.11@93.618,66.534 cw(c93.618,65.012) 94.694,66.088 ; AT89S52.11@93.618,66.788 cw(c93.618,65.879) 94.26,66.522 ; AT89S52.11@94.14,67.309 ccw(c95.749,67.309) 94.611,66.171 ; AT89S52.11@94.394,67.309 ccw(c96.616,67.309) 95.045,65.737 ; v1@129.435,42.059 ccw(c128.568,41.192) 128.568,42.418 ccw(c128.568,43.644) v1@129.435,42.777 ; v1(129.794,42.418) 103.632,42.418 102.743,43.307 102.743,58.039 93.473,67.309 AT89S52.11@93.468,67.309 86.484,60.325 ; tp1.1@150.876,36.576 150.876,37.973 151.511,38.608 红外接头.1@154.559,38.608 ; 86.484,60.325 ccw(c86.484,59.813) 86.027,60.044 cw(c86.484,59.813) 86.484,60.325 ; 86.484,60.325 cw(c86.484,60.837) 86.027,60.606 ccw(c86.484,60.837) 86.484,60.325
  Bottom Layer w0.254: MAX232.10@72.928,80.381 cw(c72.078,79.531) 73.28,79.531 cw(c74.482,79.531) MAX232.10@73.632,80.381 ; MAX232.10@73.28,80.895 73.28,77.977 77.978,73.279 77.978,61.341 78.994,60.325 P3.2@85.471,60.325 ; P3.2@85.03,59.884 ccw(c83.967,58.821) 83.967,60.325 ccw(c83.967,61.829) P3.2@85.03,60.766 ; P3.2@85.21,60.064 ccw(c84.58,59.434) 84.58,60.325 ccw(c84.58,61.216) P3.2@85.21,60.586 ; v1@129.794,41.91 cw(c129.794,41.297) 130.228,41.73 ; v1(129.794,42.418) 129.794,42.164 137.287,34.671 148.209,34.671 150.495,32.385 151.892,32.385 152.908,33.401 152.908,35.941 152.273,36.576 cw(c152.273,37.831) tp1.1@151.34,36.992 ; v1@130.048,42.418 ccw(c131.274,42.418) 130.407,41.551 ; v1@130.302,42.418 ccw(c132.142,42.418) 130.841,41.117
P32: AT89S52.12 P3.3 tp1.2 | length 114.8
  Top Layer w0.254: P3.3@85.471,57.785 86.741,57.785 ; P3.3@85.763,57.559 cw(c86.223,57.203) 86.223,57.785 cw(c86.223,58.367) P3.3@85.763,58.011 ; P3.3@85.964,57.404 cw(c86.741,56.802) 86.741,57.785 ; P3.3@85.964,58.166 ccw(c86.741,58.768) 86.741,57.785 ; 91.892,62.936 ccw(c90.312,64.516) AT89S52.12@92.547,64.516 ; 92.254,63.298 cw(c93.322,62.231) AT89S52.12@93.322,63.741 ; 92.326,63.37 ccw(c91.18,64.516) AT89S52.12@92.801,64.516 ; 92.688,63.732 cw(c93.322,63.098) AT89S52.12@93.322,63.995 ; 92.759,63.803 ccw(c92.047,64.516) AT89S52.12@93.055,64.516 ; AT89S52.12@93.622,63.741 cw(c93.622,61.618) 95.123,63.119 ; AT89S52.12@93.622,63.995 cw(c93.622,62.485) 94.69,63.552 ; AT89S52.12@94.143,64.516 ccw(c95.151,64.516) 94.439,63.803 ; AT89S52.12@94.397,64.516 ccw(c96.018,64.516) 94.872,63.37 ; 129.934,41.402 ccw(c129.934,43.929) v1@131.721,42.142 ; 130.547,41.402 ccw(c130.547,43.316) v1@131.9,41.963 ; 131.16,41.402 ccw(c131.16,42.703) v1(132.08,41.783) 131.699,41.402 102.362,41.402 101.727,42.037 101.727,56.515 93.726,64.516 AT89S52.12@93.472,64.516 86.741,57.785
  Bottom Layer w0.254: v1(132.08,41.783) 132.08,40.767 ; tp1.2@150.253,34.036 ccw(c148.749,34.036) 149.812,35.1 ccw(c150.876,36.163) tp1.2@150.876,34.659 ; tp1.2@150.507,34.036 ccw(c149.616,34.036) 150.246,34.666 ccw(c150.876,35.296) tp1.2@150.876,34.405 ; tp1.2@150.876,34.036 149.733,35.179 137.668,35.179 132.08,40.767 ; 132.08,40.767 ccw(c131.318,40.767) 131.775,41.377 cw(c131.318,40.767) 132.08,40.767 ; 132.08,40.767 cw(c132.842,40.767) 132.385,41.377 ccw(c132.842,40.767) 132.08,40.767
P33: 4.7k.2 18b20.2 24LC02.6 AT89S52.13 P3.4 | length 145.9
  Top Layer w0.254: P3.4@85.471,55.245 86.741,55.245 ; P3.4@85.763,55.019 cw(c86.223,54.663) 86.223,55.245 cw(c86.223,55.827) P3.4@85.763,55.471 ; P3.4@85.964,54.864 cw(c86.741,54.262) 86.741,55.245 ; P3.4@85.964,55.626 ccw(c86.741,56.228) 86.741,55.245 ; 91.892,60.396 ccw(c90.312,61.976) AT89S52.13@92.547,61.976 ; 92.254,60.758 cw(c93.322,59.691) AT89S52.13@93.322,61.201 ; 92.326,60.83 ccw(c91.18,61.976) AT89S52.13@92.801,61.976 ; 92.688,61.192 cw(c93.322,60.558) AT89S52.13@93.322,61.455 ; 92.759,61.263 ccw(c92.047,61.976) AT89S52.13@93.055,61.976 ; AT89S52.13@93.622,61.201 cw(c93.622,59.691) 94.69,60.758 ; AT89S52.13@93.622,61.455 cw(c93.622,60.558) 94.256,61.192 ; AT89S52.13@93.889,61.976 ccw(c94.897,61.976) 94.185,61.263 ; AT89S52.13@94.143,61.976 ccw(c95.764,61.976) 94.618,60.83 ; AT89S52.13@94.397,61.976 ccw(c96.632,61.976) 95.052,60.396 ; 131.786,40.386 ccw(c131.786,43.347) v1@133.88,41.253 ; 132.399,40.386 ccw(c132.399,42.734) v1@134.059,41.074 ; 133.013,40.386 ccw(c133.013,42.12) v1(134.239,40.894) 133.731,40.386 ; 133.626,40.386 ccw(c133.626,41.507) v1@134.419,40.714 ; 86.741,55.245 AT89S52.13@93.472,61.976 100.584,54.864 100.584,41.783 101.981,40.386 133.731,40.386 ; 133.731,40.386 ccw(c133.551,40.566) 133.781,40.675 cw(c133.551,40.566) 133.731,40.386 ; 133.731,40.386 cw(c133.911,40.206) 134.02,40.436 ccw(c133.911,40.206) 133.731,40.386
  Bottom Layer w0.254: v1@134.239,40.386 cw(c134.239,40.079) 134.456,40.296 ; v1(134.239,40.894) 134.239,40.513 135.382,39.37 143.256,39.37 144.272,40.386 144.272,44.831 144.653,45.212 147.701,45.212 147.701,51.054 148.463,51.816 4.7k.2@148.844,51.816 148.844,56.007 147.193,57.658 147.193,59.558 24LC02.6@145.792,60.959 24LC02.6@146.178,60.959 ; v1@134.491,40.866 ccw(c135.623,40.739) 134.818,39.934 ; v1@134.744,40.838 ccw(c136.295,40.664) 135.191,39.561 ; 18b20.2@143.831,42.231 cw(c142.768,41.168) 144.272,41.168 cw(c145.776,41.168) 18b20.2@144.713,42.231 ; 18b20.2@143.831,43.113 ccw(c142.768,44.176) 144.272,44.176 ccw(c145.776,44.176) 18b20.2@144.713,43.113 ; 18b20.2@144.011,42.411 cw(c143.381,41.781) 144.272,41.781 cw(c145.163,41.781) 18b20.2@144.533,42.411 ; 18b20.2@144.011,42.933 ccw(c143.381,43.563) 144.272,43.563 ccw(c145.163,43.563) 18b20.2@144.533,42.933 ; 24LC02.6@145.97,60.476 cw(c145.97,59.741) 146.49,60.261 ; 24LC02.6@146.199,60.959 ccw(c147.18,60.959) 146.486,60.265 ; 24LC02.6@146.453,60.959 ccw(c148.047,60.959) 146.92,59.832 ; 147.832,51.185 cw(c148.527,50.489) 4.7k.2@148.755,51.445 ; 148.029,51.382 ccw(c147.596,51.816) 4.7k.2@148.209,51.816 ; 4.7k.2@148.395,52.265 ccw(c147.311,53.349) 148.844,53.349 ccw(c150.377,53.349) 4.7k.2@149.293,52.265 ; 4.7k.2@148.575,52.085 ccw(c147.924,52.736) 148.844,52.736 ccw(c149.764,52.736) 4.7k.2@149.113,52.085
P34: 24LC02.5 AT89S52.14 DS1302.5 P3.5 R50.1 | length 147.7
  Top Layer w0.254: P3.5@85.471,52.705 86.741,52.705 ; P3.5@85.763,52.479 cw(c86.223,52.123) 86.223,52.705 cw(c86.223,53.287) P3.5@85.763,52.931 ; P3.5@85.964,52.324 cw(c86.741,51.722) 86.741,52.705 ; P3.5@85.964,53.086 ccw(c86.741,53.688) 86.741,52.705 ; 91.892,57.856 ccw(c90.312,59.436) AT89S52.14@92.547,59.436 ; 92.254,58.218 cw(c93.322,57.151) AT89S52.14@93.322,58.661 ; 92.326,58.29 ccw(c91.18,59.436) AT89S52.14@92.801,59.436 ; 92.688,58.652 cw(c93.322,58.018) AT89S52.14@93.322,58.915 ; 92.759,58.723 ccw(c92.047,59.436) AT89S52.14@93.055,59.436 ; AT89S52.14@93.622,58.661 cw(c93.622,55.618) 95.774,57.769 ; AT89S52.14@93.622,58.915 cw(c93.622,56.485) 95.34,58.203 ; AT89S52.14@93.622,59.169 cw(c93.622,57.352) 94.906,58.637 ; AT89S52.14@93.622,59.423 cw(c93.622,58.219) 94.473,59.07 ; AT89S52.14@94.397,59.436 ccw(c95.098,59.436) 94.603,58.94 ; v1@139.849,47.139 ccw(c138.982,46.272) 138.982,47.498 ccw(c138.982,48.724) v1@139.849,47.857 ; v1(140.208,47.498) 137.414,47.498 135.382,45.466 135.382,39.878 135.128,39.624 100.838,39.624 99.695,40.767 99.695,53.848 94.107,59.436 AT89S52.14@93.472,59.436 86.741,52.705 ; 24LC02.5@145.457,58.072 cw(c144.691,57.281) 145.792,57.281 ; 24LC02.5@145.792,58.419 145.792,57.281 ; 24LC02.5@146.128,58.072 ccw(c146.893,57.281) 145.792,57.281 ; R50.1@153.475,52.265 ccw(c152.391,53.349) 153.924,53.349 ccw(c155.457,53.349) R50.1@154.373,52.265 ; R50.1@153.655,52.085 ccw(c153.004,52.736) 153.924,52.736 ccw(c154.844,52.736) R50.1@154.193,52.085 ; R50.1@153.924,51.816 153.924,56.515 ; 155.333,57.292 ccw(c154.205,58.419) DS1302.5@155.8,58.419 ; 155.762,57.721 cw(c156.282,57.201) DS1302.5@156.282,57.936 ; 155.766,57.725 ccw(c155.073,58.419) DS1302.5@156.054,58.419 ; DS1302.5@156.46,58.419 154.556,56.515 146.558,56.515 145.792,57.281
  Bottom Layer w0.254: v1(140.208,47.498) 143.256,47.498 v1(143.383,47.625) 143.383,56.01 24LC02.5@145.792,58.419 ; v1@140.567,47.139 cw(c141.434,46.272) 141.434,47.498 cw(c141.434,48.724) v1@140.567,47.857 ; 141.85,47.498 ccw(c141.85,49.158) 143.024,47.984 ccw(c142.157,48.851) 143.383,48.851 ccw(c144.609,48.851) v1@143.742,47.984 ; v1@143.024,47.266 ccw(c142.463,46.705) 142.463,47.498 ccw(c142.463,48.545) v1@143.203,47.805 ; 144.665,57.292 ccw(c143.537,58.419) 24LC02.5@145.132,58.419 ; 145.094,57.721 cw(c145.614,57.201) 24LC02.5@145.614,57.936 ; 145.098,57.725 ccw(c144.405,58.419) 24LC02.5@145.386,58.419